# Altium PCB LED_PCB.PcbDoc
Units mil, origin at the board's own origin, x right, y up, seen from the top; angles counter-clockwise.
Board outline 2990 x 2990 mil, 2 copper layers (Top Layer, Bottom Layer); 25 components, 17 nets, 76 pads, 56 vias.
Unrouted connection lines stored in the file: 28.
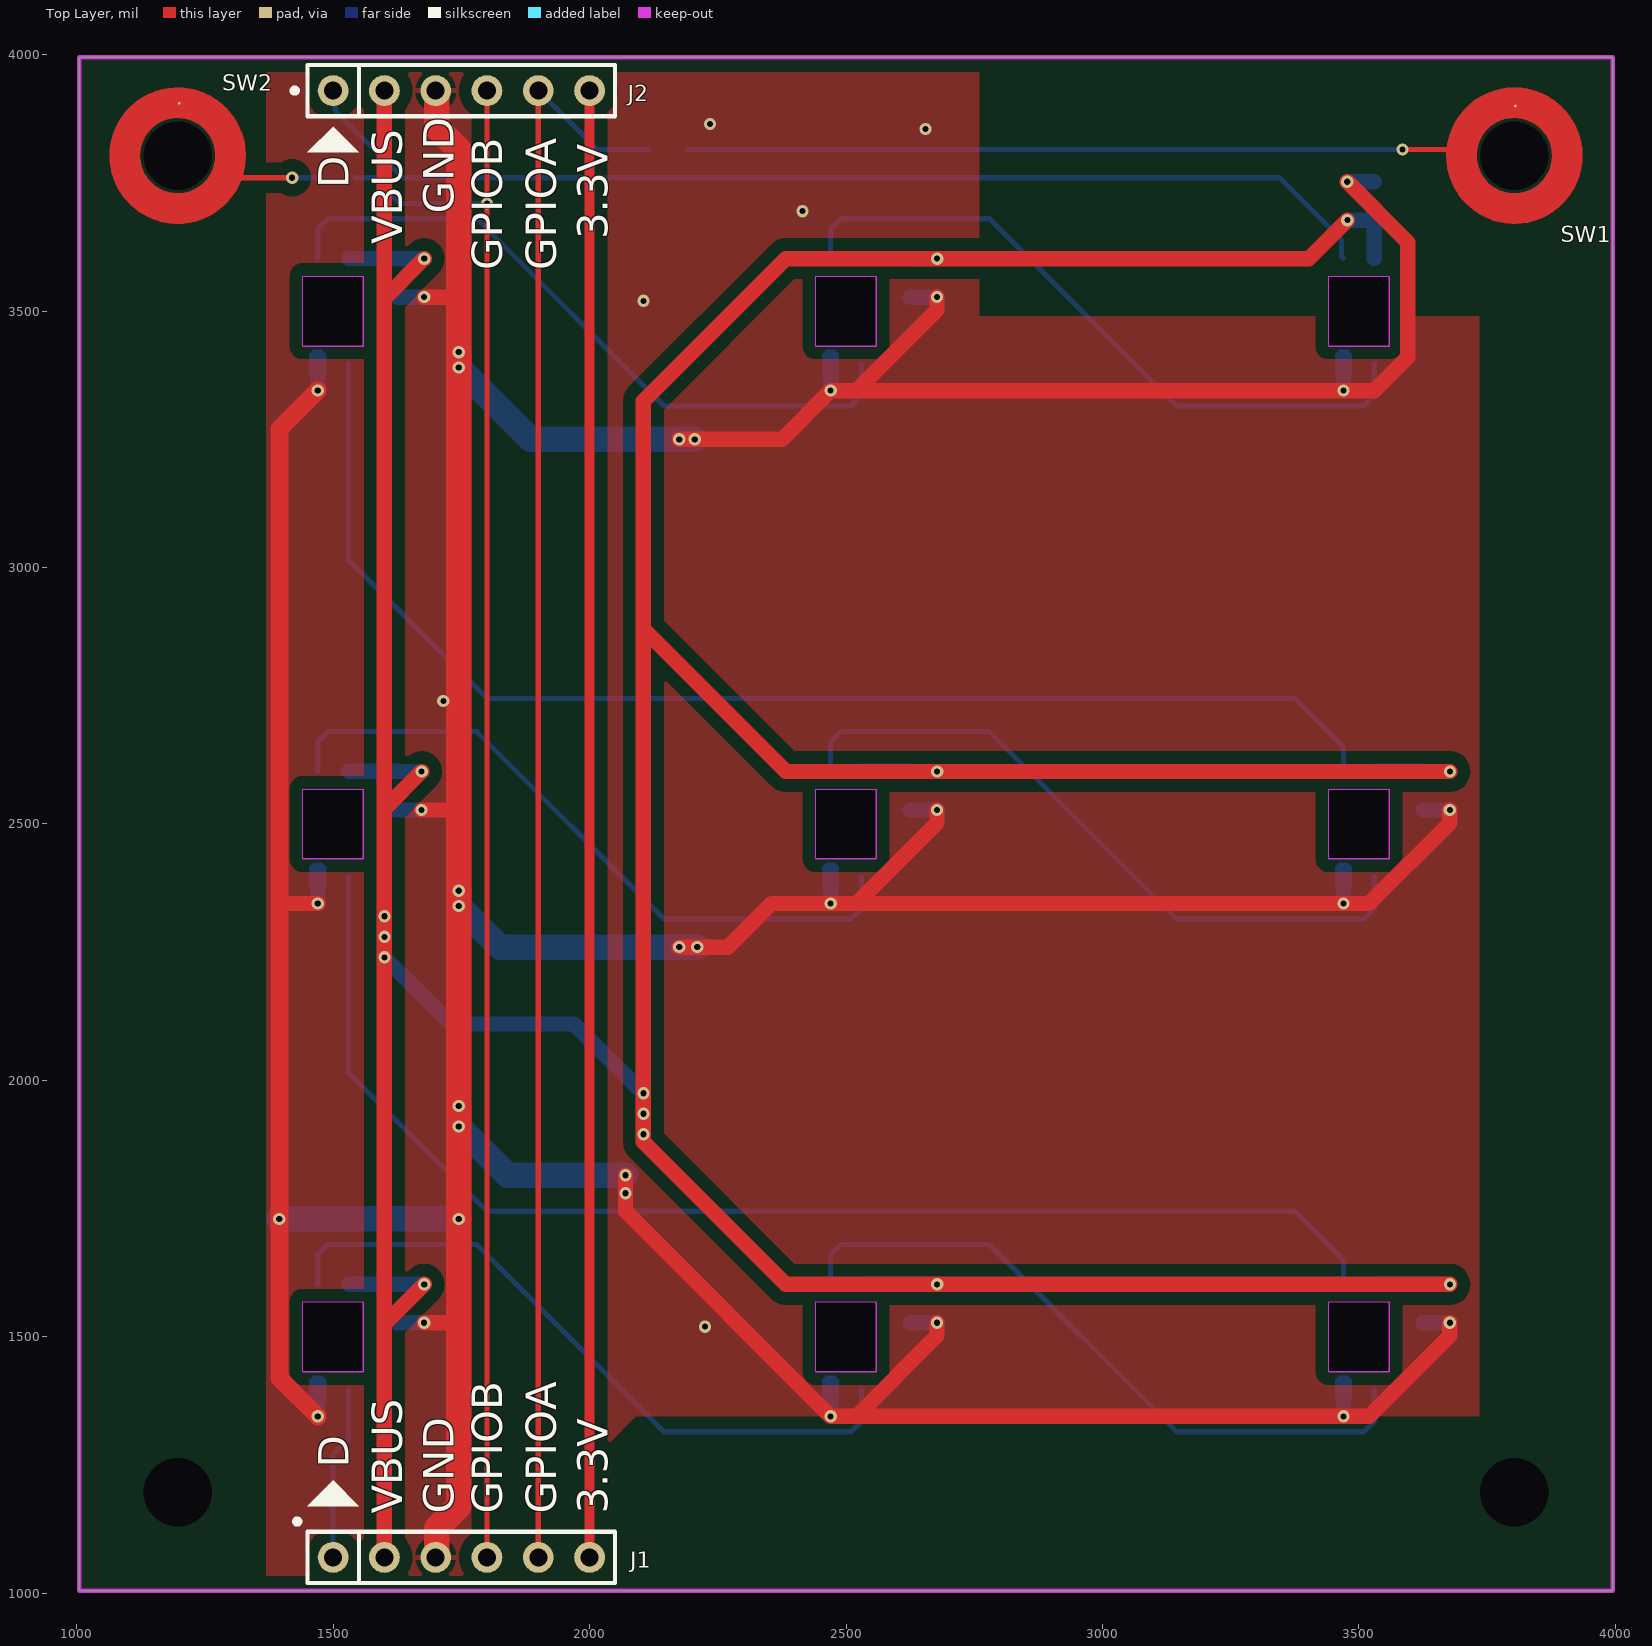
[diagram p0: Top Layer view]
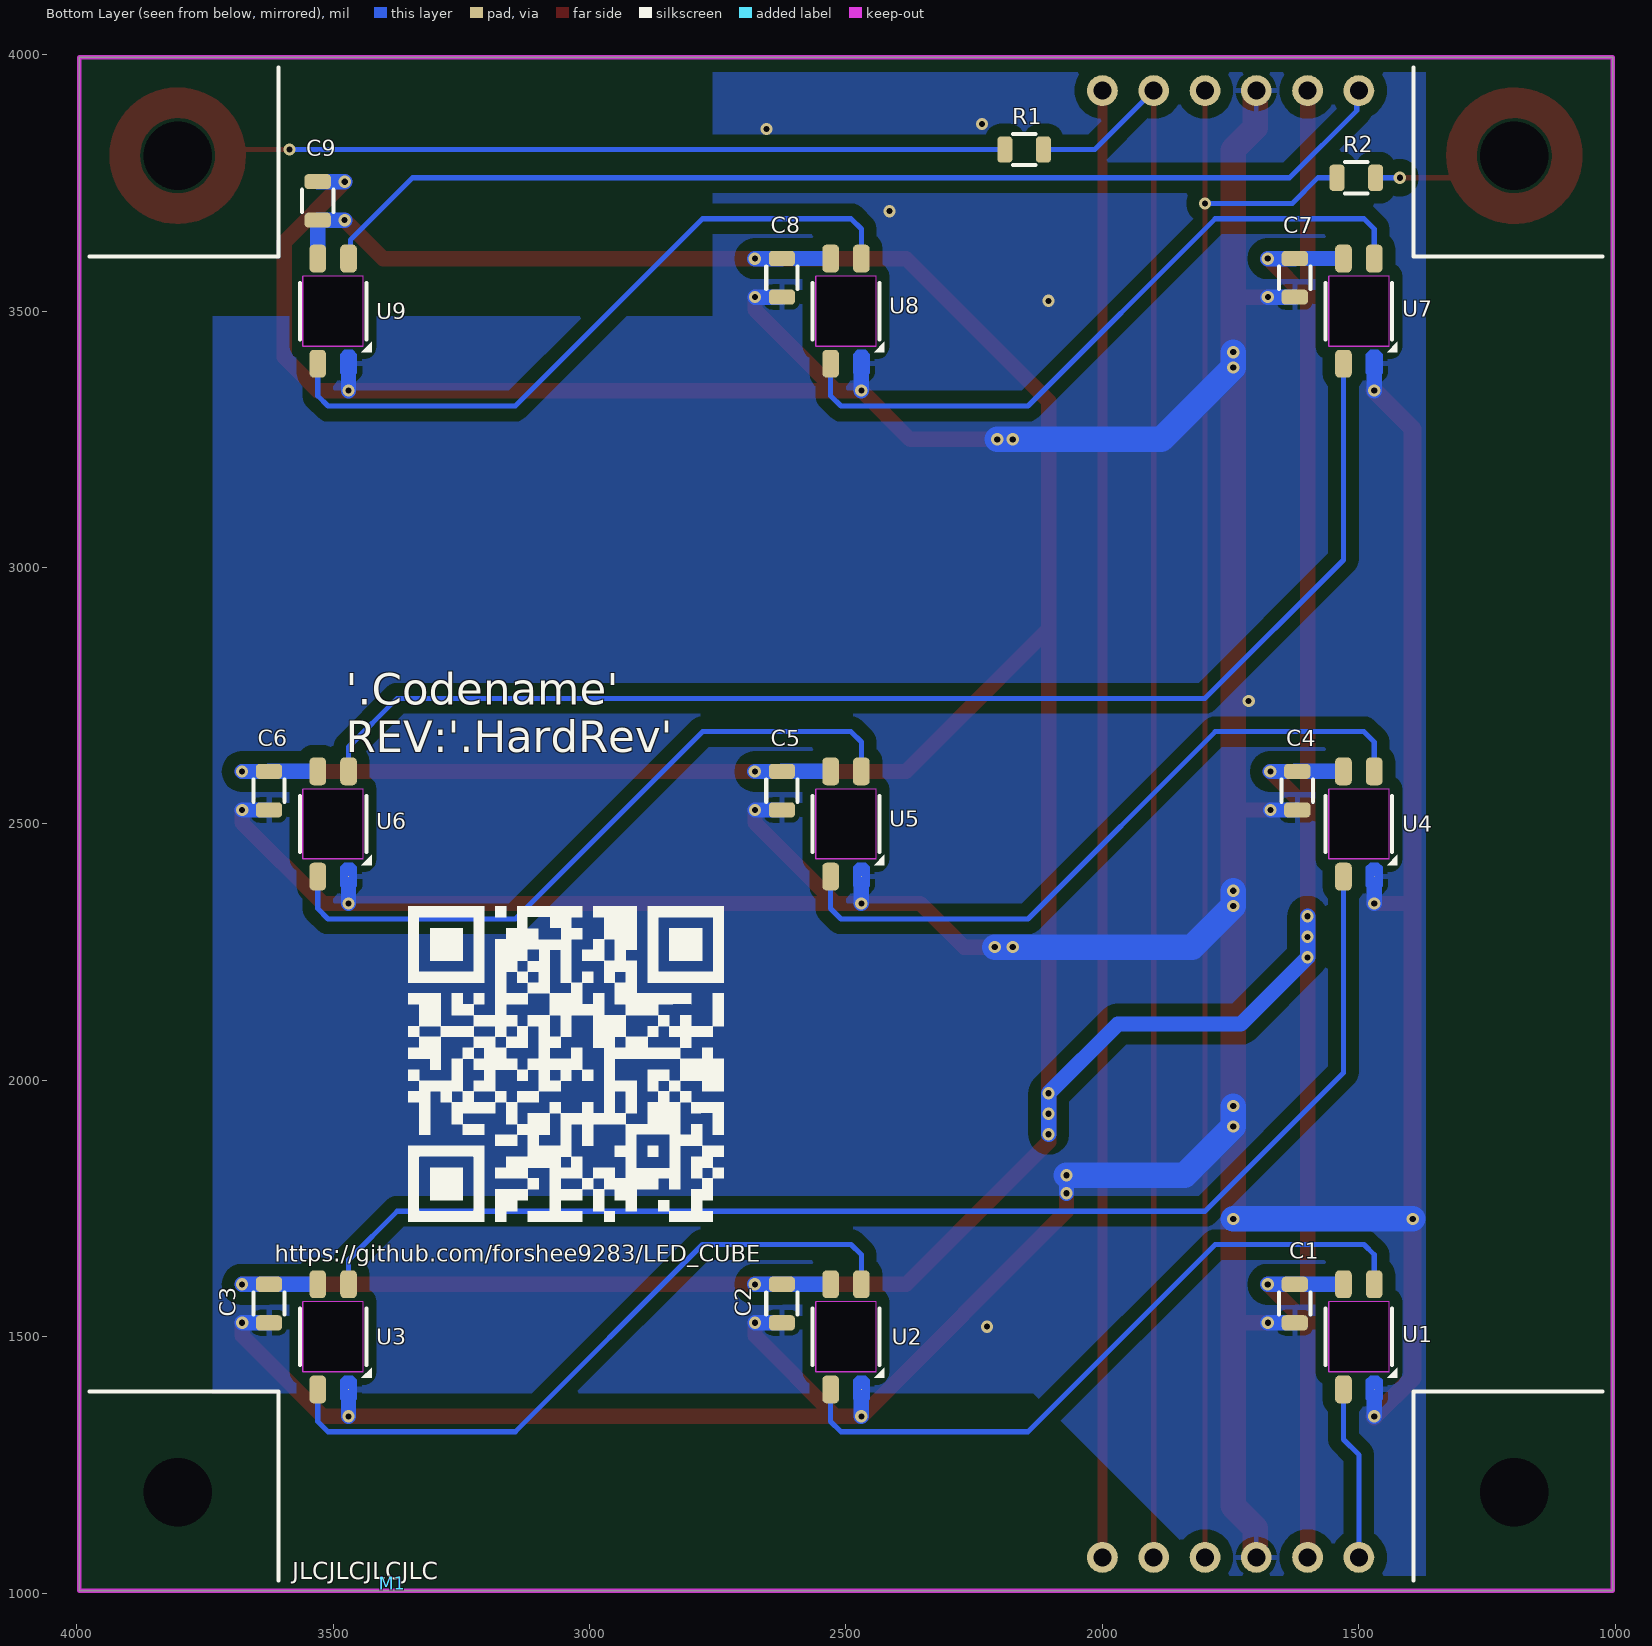
[diagram p1: Bottom Layer view, seen from below]

## Layer stack, top to bottom
Top Solder: solder mask 0.4, Solder Resist, Dk 3.5
Top Layer: signal copper 1.4
Dielectric 1: dielectric 12.6, FR-4, Dk 4.8
Bottom Layer: signal copper 1.4
Bottom Solder: solder mask 0.4, Solder Resist, Dk 3.5

## Board outline
1005,1005 1005,3995 3995,3995 3995,1005
cut-out: 3440.94,1568 3559.05,1568 3559.05,1432 3440.94,1432
cut-out: 2440.94,1568 2559.05,1568 2559.05,1432 2440.94,1432
cut-out: 1440.94,1568 1559.05,1568 1559.05,1432 1440.94,1432
cut-out: 1440.94,2568 1559.05,2568 1559.05,2432 1440.94,2432
cut-out: 2440.94,2568 2559.05,2568 2559.05,2432 2440.94,2432
cut-out: 3440.94,2568 3559.05,2568 3559.05,2432 3440.94,2432
cut-out: 3440.94,3568 3559.05,3568 3559.05,3432 3440.94,3432
cut-out: 2440.94,3568 2559.05,3568 2559.05,3432 2440.94,3432
cut-out: 1440.94,3568 1559.05,3568 1559.05,3432 1440.94,3432

## Design rules (kind name [scope] priority, off if disabled: settings)
Clearance Clearance_Poly [All vs InPoly] p1: gap=25 ignorepadtopadclearanceinfootprint=FALSE
Clearance [All] p2: gap=5 ignorepadtopadclearanceinfootprint=FALSE except(0: Arc-Hole Track-Hole SMDPad-Hole THPad-Hole Via-Hole Fill-Hole Poly-Hole Region-Hole Text-Hole)
HoleSize [All] p1: absolutevalues=TRUE maxlimit=99999 minlimit=1 maxpercent=80.000 minpercent=20.000
PlaneConnect [All] p1: pad.planeconnectstyle=Relief pad.reliefexpansion=20 pad.reliefentries=4 pad.reliefconductorwidth=10 pad.reliefairgap=10 via.planeconnectstyle=Direct via.reliefexpansion=20 via.reliefentries=4 via.reliefconductorwidth=10 via.reliefairgap=10
PolygonConnect [All] p1: thpad.connectstyle=Relief thpad.reliefconductorwidth=10 thpad.reliefentries=4 thpad.polygonreliefangle="90 Angle" thpad.airgapwidth=10 smdpad.connectstyle=Relief smdpad.reliefconductorwidth=10 smdpad.reliefentries=4 smdpad.polygonreliefangle="90 Angle" smdpad.airgapwidth=10 via.connectstyle=Direct via.reliefconductorwidth=10 via.reliefentries=4 via.polygonreliefangle="90 Angle" via.airgapwidth=10
RoutingVias [All] p1: holewidth=28 width=50 viastyle="Through Hole" minholewidth=28 minwidth=50 maxholewidth=28 maxwidth=50
SilkToSolderMaskClearance [IsPad] p1: minsilkscreentomaskgap=0 clearancetoexposedcopper=TRUE
SolderMaskExpansion [All] p1: expansion=4 istentingtop=FALSE
Width [All] p1: maxlimit=10000 minlimit=6 preferedwidth=10
27 further rules are at their usual default settings.

## Components (designator, comment, footprint, x,y, rotation, side; value= is the part's Value field where it differs from the comment)
C1 "0.1µF" Chip0805 1625,1565 r90 bottom
C2 "0.1µF" Chip0805 2625,1565 r90 bottom
C3 "0.1µF" Chip0805 3625,1565 r90 bottom
C4 "0.1µF" Chip0805 1620,2565 r90 bottom
C5 "0.1µF" Chip0805 2625,2565 r90 bottom
C6 "0.1µF" Chip0805 3625,2565 r90 bottom
C7 "0.1µF" Chip0805 1625,3565 r90 bottom
C8 "0.1µF" Chip0805 2625,3565 r90 bottom
C9 "0.1µF" Chip0805 3530,3715 r270 bottom
J1 "HEADER_1x6_NO_BOM" HEADER_1x6_100mil_NP 1750,1070 r0 top locked
J2 "HEADER_1x6_NO_BOM" HEADER_1x6_100mil_NP 1750,3930 r0 top locked
M1 "JLC_NUMBER" JLC_NUMBER 3385,1020 r180 bottom
R1 "0" Chip0805 2152.6,3815 r180 bottom
R2 "0" Chip0805 1505,3760 r0 bottom
SW1 "TOUCH_PAD_NO_BOM" TENTED_PAD_5mil 3805,3900 r90 top
SW2 "TOUCH_PAD_NO_BOM" TENTED_PAD_5mil 1200,3905 r90 top
U1 "SK6812MINI-E" SK6812MINI-E 1500,1500 r90 bottom
U2 "SK6812MINI-E" SK6812MINI-E 2500,1500 r90 bottom
U3 "SK6812MINI-E" SK6812MINI-E 3500,1500 r90 bottom
U4 "SK6812MINI-E" SK6812MINI-E 1500,2500 r90 bottom
U5 "SK6812MINI-E" SK6812MINI-E 2500,2500 r90 bottom
U6 "SK6812MINI-E" SK6812MINI-E 3500,2500 r90 bottom
U7 "SK6812MINI-E" SK6812MINI-E 1500,3500 r90 bottom
U8 "SK6812MINI-E" SK6812MINI-E 2500,3500 r90 bottom
U9 "SK6812MINI-E" SK6812MINI-E 3500,3500 r90 bottom

## Footprints (in the part's own frame and the unit in brackets; to place one, negate y for a bottom-side part, rotate by r counter-clockwise, add the part's x,y. Pads: shape width x height; smd on the part's side, far side on the other; paste and mask are expansions set on the pad)
Chip0805 [mm] "Chip Resistor, 2-Leads, Body 2.05x1.25mm, IPC Medium Density"
  rrect50% 0.75x1.3 smd: 1(-0.955,0) 2(0.955,0)
  silkscreen extent -0.55,-0.77 0.55,0.77, body extent -0.95,-0.55 0.95,0.55, height 0.5
HEADER_1x6_100mil_NP [mil]
  round 60 hole 35: 1(-250,0) 2(-150,0) 3(-50,0) 4(50,0) 5(150,0) 6(250,0)
  silkscreen extent -325,-50 300,75
JLC_NUMBER [mil]
SK6812MINI-E [mil]
  rrect50% 54x32.28 smd: 1(102.53,30) 2(102.53,-30) 4(-102.53,30)
  round 1 smd: 3(-102.53,-30)
  Top Layer region: -83.6,-13.86 -75.53,-21.93 -75.53,-38.07 -83.6,-46.14 -121.46,-46.14 -129.53,-38.07 -129.53,-21.93 -121.46,-13.86
  Keep-Out Layer lines w1.97: -68,-59.06 -68,59.06 68,59.06 68,-59.06 -68,-59.06
  silkscreen extent -80,-75 55,65, body extent -116,-55 116,55, height 38
TENTED_PAD_5mil [mil]
  round 5 smd mask+4: 1(0,0)

## Part data
C1 C2 C3 C4 C5 C6 C7 C8 C9: library part C2012X7T2E104K125AA, "CAP CER 0.1UF 250V 10% X7T 0805", Manufacturer="TDK Corporation", Operating Temperature="-55°C ~ 125°C", Package / Case="0805 (2012 Metric)", Ratings=-, Supplier Part Number 1=445-7749-1-ND, Temperature Coefficient=X7T, Tolerance=±10%, Voltage=250V, Applications="General Purpose", Capacitance=0.1µF, Features=-, Height - Seated (Max)=-, HelpURL=http://product.tdk.com/capacitor/mlcc/en/documents/mlcc_commercial_midvoltage_en.pdf, Lead Spacing=-, Lead Style=-, Manufacturer Part Number=C2012X7T2E104K125AA, Mounting Type="Surface Mount, MLCC", PartNumber=C2012X7T2E104K125AA, Series=C, Size / Dimension="0.079\" L x 0.049\" W (2.00mm x 1.25mm)", Supplier 1=Digi-Key, Supplier 2=Mouser, Thickness (Max)="0.057\" (1.45mm)"
M1: "JLC Order Number Location", Manufacturer Part Number=JLC_NUMBER, PartNumber=JLC_NUMBER
R1 R2: library part CRCW08050000Z0EA, "RES 0.0 OHM 1/8W JUMP 0805 SMD", Manufacturer="Vishay Dale", Package / Case="0805 (2012 Metric)", Power (Watts)="0.125W, 1/8W", Supplier Part Number 1=541-0.0ACT-ND, Temperature Coefficient=-, Tolerance=Jumper, Composition="Thick Film", Features="Automotive AEC-Q200 Qualified", Height="0.020\" (0.50mm)", HelpURL=http://www.vishay.com/doc?20035, Manufacturer Part Number=CRCW08050000Z0EA, Number of Terminations=2, PartNumber=CRCW08050000Z0EA, Resistance=0, Series=CRCW, Size / Dimension="0.079\" L x 0.049\" W (2.00mm x 1.25mm)", Supplier 1=Digi-Key, Supplier 2=Mouser, Supplier Device Package="0805 (2012 Metric)"
U1 U2 U3 U4 U5 U6 U7 U8 U9: "Addressable RGB LED", Manufacturer="Adafruit Industries LLC", Supplier Part Number 1=1528-4960-ND, Datasheets=https://cdn-shop.adafruit.com/product-files/4960/4960_SK6812MINI-E_REV02_EN.pdf, Manufacturer Part Number=SK6812MINI-E, PartNumber=SK6812MINI-E, Supplier 1=Digi-Key
J1 J2: Manufacturer Part Number=HEADER_1x6_NO_BOM, PartNumber=HEADER_1x6_NO_BOM
SW1 SW2: Manufacturer Part Number=TOUCH_PAD_NO_BOM, PartNumber=TOUCH_PAD_NO_BOM

## Free pads (board coordinates)
  round 10 hole 133.86 unplated: 0(1196.85,1196.85) 0(1196.85,3803.15) 0(3803.15,1196.85) 0(3803.15,3803.15)

## Via types
v1: diameter 24, hole 12, Top Layer to Bottom Layer, tented both sides, 56 vias

## Nets (pads, with @x,y where several pads share a name; then routed paths per layer and width w, separated by ;. In a path a pad name is that pad's centre, name@x,y a point inside that pad or via, vN(x,y) a via of type N, cw(c..) or ccw(c..) an arc to the next point about the centre after c; other vN are vias at no path point)
3.3V: J1.6 J2.6 | length 2860
  Top Layer w20: J1.6 J2.6
DATA_IN: J1.1 U1.4 | length 339.9
  Bottom Layer w10: J1.1 1500,1270 1530,1300 U1.4
DATA_OUT: J2.1 U9.2 | length 2145.2
  Bottom Layer w10: J2.1 1504.14,3925.86 1504.14,3890.86 1635,3760 3345,3760 3466.42,3638.58 3466.42,3606.1 U9.2
GND: C1.1 C2.1 C3.1 C4.1 C5.1 C6.1 C7.1 C8.1 C9.1 J1.3 J2.3 U1.3 U2.3 U3.3 U4.3 U5.3 U6.3 U7.3 U8.3 U9.3 | length 14234.8
  Top Layer w30: 1395,2345.07 v1(1470,2345.07) ; v1(1672.4,2527.4) 1742.4,2527.4 1745,2530 ; v1(1677.4,1527.4) 1742.6,1527.4 1745,1525 ; v1(1677.4,3527.4) 1742.6,3527.4 1745,3525 ; v1(2070,1815) v1(2070,1780.04) 2070,1745.07 v1(2470,1345.07) 2520.07,1345.07 ; v1(2175,2260) v1(2210,2260) 2270,2260 2355.07,2345.07 v1(2470,2345.07) 2520.07,2345.07 ; v1(2175,3250) v1(2205,3250) 2374.93,3250 v1(2470,3345.07) 2520.07,3345.07 ; v1(2677.4,1527.4) 2677.4,1502.4 2520.07,1345.07 ; v1(2677.4,2527.4) 2677.4,2502.4 2520.07,2345.07 ; v1(2677.4,3527.4) 2677.4,3502.4 2520.07,3345.07 ; v1(3477.36,3752.36) 3595,3634.72 3595,3410 3530.07,3345.07 v1(3470,3345.07) 2520.07,3345.07 ; v1(3677.4,1527.4) 3677.4,1502.4 3520.07,1345.07 v1(3470,1345.07) 2520.07,1345.07 ; v1(3677.4,2527.4) 3677.4,2502.4 3520.07,2345.07 v1(3470,2345.07) 2520.07,2345.07
  Top Layer w35: v1(1470,1345.07) 1395,1420.07 v1(1395,1730) 1395,2345.07 1395,3270.07 v1(1470,3345.07)
  Top Layer w50: J1.3 1701.91,1071.91 1701.91,1126.91 1745,1170 1745,1525 v1(1745,1730) v1(1745,1910) v1(1745,1950) v1(1745,2340) v1(1745,2370) 1745,2530 v1(1745,3390) v1(1745,3420) 1745,3525 1745,3815 1701.91,3858.09 1701.91,3928.09 J2.3
  Bottom Layer w30: v1(1470,1345.07) U1.3 ; v1(1470,2345.07) U4.3 ; v1(1470,3345.07) U7.3 ; C4.1 v1(1672.4,2527.4) ; C1.1 v1(1677.4,1527.4) ; C7.1 v1(1677.4,3527.4) ; v1(2070,1780.04) v1(2070,1815) ; v1(2470,1345.07) U2.3 ; v1(2470,2345.07) U5.3 ; v1(2470,3345.07) U8.3 ; C2.1 v1(2677.4,1527.4) ; C5.1 v1(2677.4,2527.4) ; C8.1 v1(2677.4,3527.4) ; v1(3470,1345.07) U3.3 ; v1(3470,2345.07) U6.3 ; v1(3470,3345.07) U9.3 ; v1(3477.36,3752.36) C9.1@3529.76,3752.36 ; C3.1 v1(3677.4,1527.4) ; C6.1 v1(3677.4,2527.4)
  Bottom Layer w50: v1(1395,1730) v1(1745,1730) ; v1(1745,1950) v1(1745,1910) 1840,1815 v1(2070,1815) ; v1(1745,2370) v1(1745,2340) 1825,2260 v1(2175,2260) v1(2210,2260) ; v1(1745,3420) v1(1745,3390) 1885,3250 v1(2175,3250) v1(2205,3250)
  other v1: 2225,1520 1715,2740 2105,3520 2415,3695 2655,3855 2235,3865
GPIO_A: J1.5 J2.5 R1.2 | length 3122.6
  Top Layer w10: J1.5 J2.5
  Bottom Layer w10: J2.5 2015,3815 R1.2
GPIO_B: J1.4 J2.4 R2.2 | length 3138.1
  Top Layer w10: J1.4 J2.4
  Bottom Layer w10: R2.2 1580,3760 1630,3710 v1(1800,3710)
NetU1_2: U1.2 U2.4 | length 1347.7
  Bottom Layer w10: U1.2 1470,1660 1490,1680 1780,1680 2145,1315 2510,1315 2530,1335 U2.4
NetU2_2: U2.2 U3.4 | length 1347.7
  Bottom Layer w10: U2.2 2470,1660 2490,1680 2780,1680 3145,1315 3510,1315 3530,1335 U3.4
NetU3_2: U3.2 U4.4 | length 2521.1
  Bottom Layer w10: U4.4 1530,2015 1800,1745 3375,1745 3470,1650 U3.2
NetU4_2: U4.2 U5.4 | length 1347.7
  Bottom Layer w10: U4.2 1470,2660 1490,2680 1780,2680 2145,2315 2510,2315 2530,2335 U5.4
NetU5_2: U5.2 U6.4 | length 1347.7
  Bottom Layer w10: U5.2 2470,2660 2490,2680 2780,2680 3145,2315 3510,2315 3530,2335 U6.4
NetU6_2: U6.2 U7.4 | length 2521.1
  Bottom Layer w10: U7.4 1530,3015 1800,2745 3375,2745 3470,2650 U6.2
NetU7_2: U7.2 U8.4 | length 1347.7
  Bottom Layer w10: U7.2 1470,3660 1490,3680 1780,3680 2145,3315 2510,3315 2530,3335 U8.4
NetU8_2: U8.2 U9.4 | length 1347.7
  Bottom Layer w10: U8.2 2470,3660 2490,3680 2780,3680 3145,3315 3510,3315 3530,3335 U9.4
TOUCH_1: R1.1 SW1.1 | length 2158.7
  Top Layer w10: v1(3585,3815) 3700.58,3815 3700.66,3814.92
  Top Layer w60: 3700.66,3814.92 ccw(c3803.15,3803.15) 3906.32,3803.15 ccw(c3803.15,3803.15) 3700.66,3814.92
  Bottom Layer w10: R1.1 v1(3585,3815)
TOUCH_2: R2.1 SW2.1 | length 834.6
  Top Layer w10: 1285.2,3749.88 1295.32,3760 v1(1420,3760)
  Top Layer w60: 1285.2,3749.88 ccw(c1196.85,3803.15) 1300.02,3803.15 ccw(c1196.85,3803.15) 1285.2,3749.88
  Bottom Layer w10: v1(1420,3760) R2.1
USB_VBUS: C1.2 C2.2 C3.2 C4.2 C5.2 C6.2 C7.2 C8.2 C9.2 J1.2 J2.2 U1.1 U2.1 U3.1 U4.1 U5.1 U6.1 U7.1 U8.1 U9.1 | length 11602.5
  Top Layer w30: J1.2 1600,1524.72 ; J2.2 1600,3524.72 ; v1(1672.64,2602.36) 1600,2529.72 ; v1(1677.64,1602.36) 1600,1524.72 ; v1(1677.64,3602.36) 1600,3524.72 ; v1(3477.6,3677.4) 3402.56,3602.36 v1(2677.64,3602.36) 2382.64,3602.36 2105,3324.72 2105,2880 ; v1(3677.64,1602.36) v1(2677.64,1602.36) 2382.64,1602.36 2105,1880 v1(2105,1895) v1(2105,1935) v1(2105,1975) 2105,2880 ; v1(3677.64,2602.36) v1(2677.64,2602.36) 2382.64,2602.36 2105,2880 ; 1600,1524.72 v1(1600,2240) v1(1600,2280) 1600,2529.72 ; 1600,2529.72 1600,3524.72
  Bottom Layer w30: U1.1 1530.04,1602.56 C1.2 C1.2 1625.24,1602.36 v1(1677.64,1602.36) ; U4.1@1530.04,2602.56 C4.2 ; U7.1@1530.04,3602.56 C7.2 ; v1(1600,2320) v1(1600,2280) v1(1600,2240) 1730,2110 1970,2110 v1(2105,1975) v1(2105,1935) v1(2105,1895) ; C4.2 C4.2 ; C4.2@1624.96,2602.56 C4.2 ; C7.2@1625.24,3602.36 v1(1677.64,3602.36) ; v1(1672.64,2602.36) 1620.24,2602.36 C4.2 ; U2.1@2530.04,1602.56 C2.2 ; U5.1@2530.04,2602.56 C5.2 ; U8.1@2530.04,3602.56 C8.2 ; C2.2@2625.24,1602.36 v1(2677.64,1602.36) ; C5.2@2625.24,2602.36 v1(2677.64,2602.36) ; C8.2@2625.24,3602.36 v1(2677.64,3602.36) ; v1(3477.6,3677.4) C9.2 U9.1 ; U3.1@3530.04,1602.56 C3.2 ; U6.1@3530.04,2602.56 C6.2 ; C3.2@3625.24,1602.36 v1(3677.64,1602.36) ; C6.2@3625.24,2602.36 v1(3677.64,2602.36)

## Polygon pours and split planes (outlines as drawn)
GND on Top Layer "GND_L01_P000" (solid, remove dead copper, pour order 0): 1370,1005 1370,3995 2760,3995 2760,3490 3735,3490 3735,1345 2090,1345 1750,1005
GND on Bottom Layer "GND_L02_P002" (solid, remove dead copper, pour order 2): 1370,1005 1370,3995 2760,3995 2760,3490 3735,3490 3735,1390 2135,1390 1750,1005

## Keep-outs
Keep-Out Layer:
  the board outline again, w7.87

## Silkscreen, mask and mechanical layers (free items; w line width, h text height)
Top Overlay:
  region: 1550,1170 1450,1170 1500,1220
  region: 1550,3809.93 1450,3809.93 1500,3859.93
  text "D" at 1530,3740 h60 r90
  text "GND" at 1735,3689.98 h60 r90
  text "3.3V" at 2035,3640 h60 r90
  text "VBUS" at 1635,3630 h60 r90
  text "GPIOB" at 1830,3580.02 h60 r90
  text "GPIOA" at 1935,3580.02 h60 r90
  text "D" at 1530,1245 h60 r90
  text "VBUS" at 1635,1155.09 h60 r90
  text "GND" at 1735,1155.09 h60 r90
  text "GPIOB" at 1830,1155.09 h60 r90
  text "GPIOA" at 1935,1155.09 h60 r90
  text "3.3V" at 2035,1155 h60 r90
Bottom Overlay:
  drawing of 62 lines, arcs and shapes, not listed
  text "'.Codename'  / REV:'.HardRev'" at 3475,2640 h62
  text "https://github.com/forshee9283/LED_CUBE" at 3614,1646.66 h32
Top Solder:
  text "é" at 2876.6,2949.59 h1000
Bottom Solder:
  text "é" at 3063.4,2949.59 h1000
Mechanical 1:
  the board outline again, w7.87

## Text inside footprints (layer, text, board x,y; h text height)
M1: Bottom Overlay "JLCJLCJLCJLC" at 3580.15,1027.87 h33.46
U1: Mechanical 1 "CUT / OUT" at 1450,1450 h30 r270
U2: Mechanical 1 "CUT / OUT" at 2450,1450 h30 r270
U3: Mechanical 1 "CUT / OUT" at 3450,1450 h30 r270
U4: Mechanical 1 "CUT / OUT" at 1450,2450 h30 r270
U5: Mechanical 1 "CUT / OUT" at 2450,2450 h30 r270
U6: Mechanical 1 "CUT / OUT" at 3450,2450 h30 r270
U7: Mechanical 1 "CUT / OUT" at 1450,3450 h30 r270
U8: Mechanical 1 "CUT / OUT" at 2450,3450 h30 r270
U9: Mechanical 1 "CUT / OUT" at 3450,3450 h30 r270